# Altium PCB ver4.0.PcbDoc (part 1 of 2)
Units mil, origin at the board's own origin, x right, y up, seen from the top; angles counter-clockwise.
Board outline 2300 x 3750 mil, 2 copper layers (Top Layer, Bottom Layer); 43 components, 35 nets, 213 pads, 55 vias.
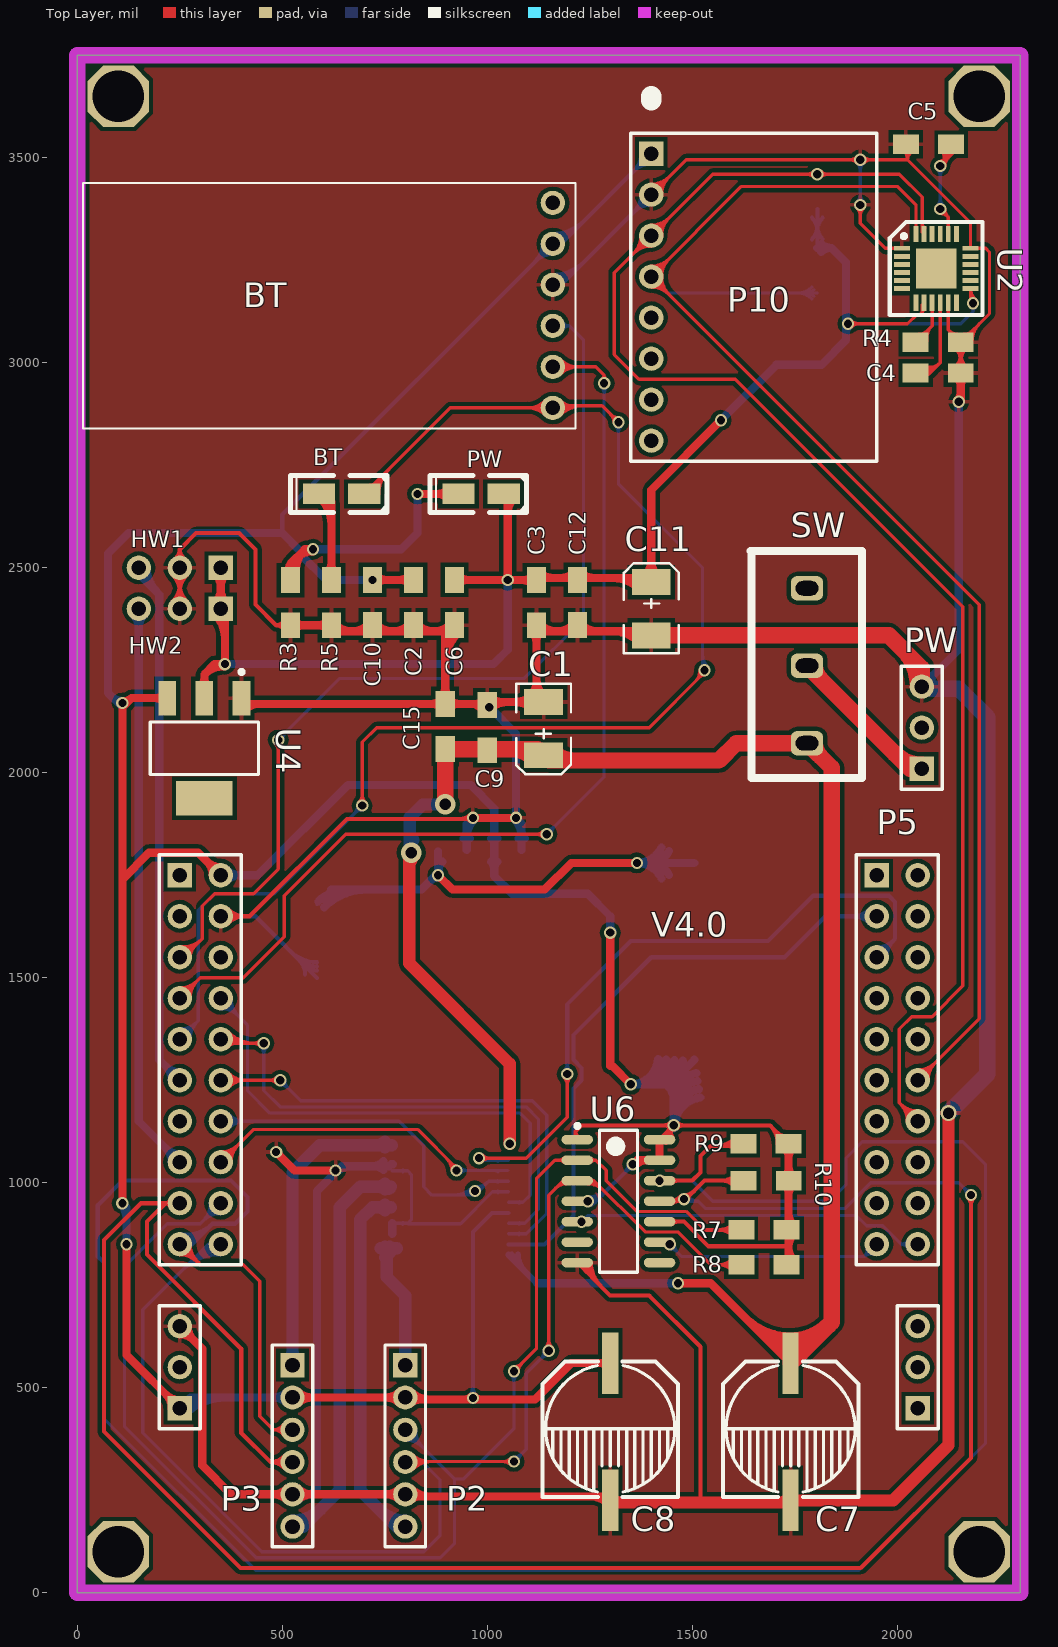
[diagram p0: Top Layer view]
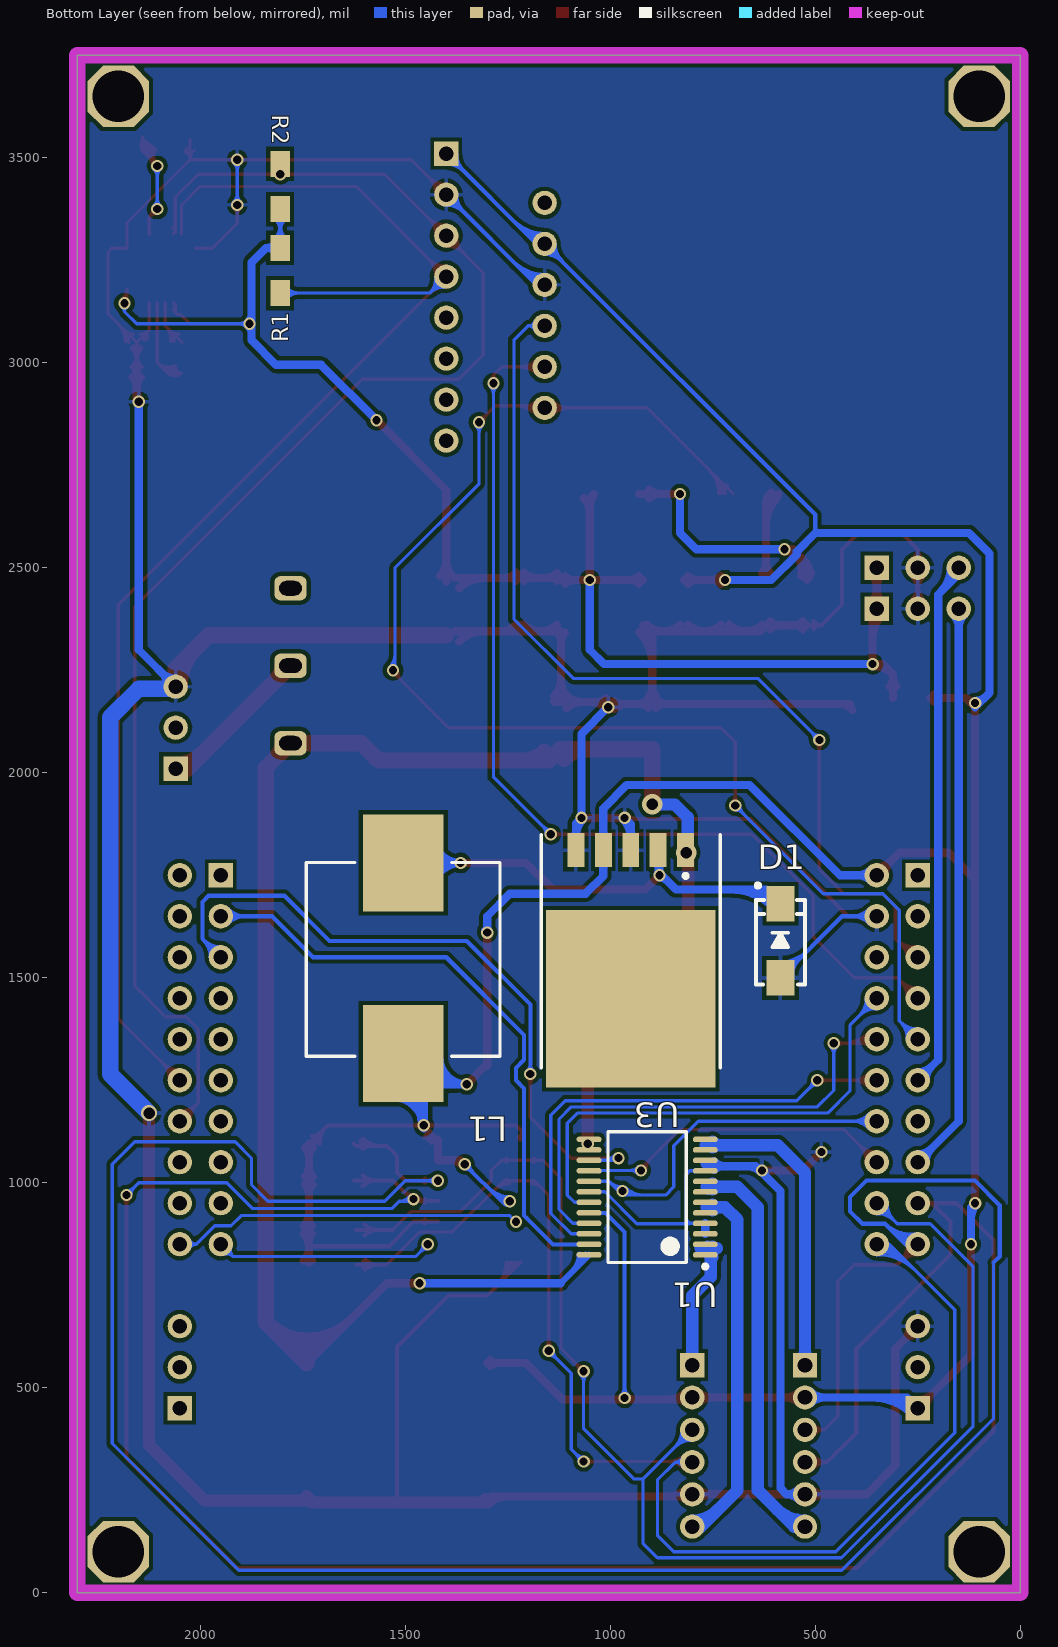
[diagram p1: Bottom Layer view, seen from below]

## Layer stack, top to bottom
Top Layer: signal copper 1.4
Dielectric: dielectric 12.6, FR-4, Dk 4.8
Bottom Layer: signal copper 1.4

## Board outline
0,0 2300,0 2300,3750 0,3750

## Design rules (kind name [scope] priority, off if disabled: settings)
Clearance [All] p1: gap=2
HoleSize [All] p1: absolutevalues=TRUE maxlimit=150 minlimit=1 maxpercent=80.000 minpercent=20.000
MinimumSolderMaskSliver [All] p1: minsoldermaskwidth=0
PlaneClearance [All] p1: clearance=10
PolygonConnect [All] p1: connectstyle=Relief reliefconductorwidth=10 reliefentries=4 polygonreliefangle="90 Angle" airgapwidth=10
RoutingVias [All] p1: holewidth=28 width=25 viastyle="Through Hole" minholewidth=10 minwidth=20 maxholewidth=28 maxwidth=50
SilkToSilkClearance [All] p1: silktosilkclearance=0
SilkToSolderMaskClearance [IsPad] p1: minsilkscreentomaskgap=0 clearancetoexposedcopper=TRUE
SolderMaskExpansion [All] p1: expansion=4
Width [All] p1: maxlimit=60 minlimit=5 preferedwidth=10
23 further rules are at their usual default settings.

## Classes and differential pairs
component class Sheet1: BT C1 C2 C3 C4 C5 C6 C7 C8 C9 C10 C11 C12 C15 D1 HW1 HW2 L1 P2 P3 P5 P10 PW R1 R2 R3 R4 R5 R7 R8 R9 R10 S2 U1 U2 U3 U4 U6 ""

## Components (designator, comment, footprint, x,y, rotation, side; value= is the part's Value field where it differs from the comment)
BT "Header 6" "HC05 MODULE" 1160,2840 r90 top (schematic designator P7)
BT "LED2" LED-0805-手工焊接 700,2680 r180 top (schematic designator D3)
C1 "Cap Pol3" "CAP POL-SMD-B" 1137.38,2107.62 r90 top
C2 "Cap" CAP-0805-手工焊接 820,2360 r90 top
C3 "Cap" CAP-0805-手工焊接 1120,2470 r270 top
C4 "Cap" CAP-0805-手工焊接 2155,2975 r180 top
C5 "Cap" CAP-0805-手工焊接 2021,3533 r0 top
C6 "Cap" CAP-0805-手工焊接 920,2360 r90 top
C7 "Cap Pol1" C_SMD(8x10.3) 1740,400 r270 top
C8 "Cap Pol1" C_SMD(8x10.3) 1300,400 r270 top
C9 "Cap" CAP-0805-手工焊接 1000,2165 r270 top
C10 "Cap" CAP-0805-手工焊接 720,2360 r90 top
C11 "Cap Pol2" "CAP POL-SMD-B" 1400,2400 r270 top
C12 "Cap" CAP-0805-手工焊接 1220,2360 r90 top
C15 "Cap" CAP-0805-手工焊接 897.38,2057.62 r90 top
D1 "E2SD" SMA 585,1590 r90 bottom
HW1 "Header 3" "HDR1*3 no_edge" 350,2500 r180 top (schematic designator P8)
HW2 "Header 3" "HDR1*3 no_edge" 350,2400 r180 top (schematic designator P9)
L1 "Inductor" CDRH127 1505,1545 r270 bottom
P2 "Header 6" "PH2.0 6P" 800,555 r270 top
P3 "Header 6" "PH2.0 6P" 525,555 r270 top
P4 "Header 10X2" "HDR2X10 - duplicate" 250,1750 r270 top
P5 "Header 10X2" "HDR2X10 - duplicate" 1950,1750 r270 top
P6 "Header 3" HDR1X3 2050,450 r90 top
P6 "Header 3" HDR1X3 250,450 r90 top
P10 "Header 8" "mpu6050 module" 1400,3510 r270 top
PW "Header 3" HDR1X3 2060,2010 r90 top (schematic designator P1)
PW "LED2" LED-0805-手工焊接 1040,2680 r180 top (schematic designator D2)
R1 "Res1" RES-0805_手工焊接 1805,3170 r90 bottom
R2 "Res1" RES-0805_手工焊接 1805,3485 r270 bottom
R3 "Res3" RES-0805_手工焊接 520,2470 r270 top
R4 "Res1" RES-0805_手工焊接 2155,3050 r180 top
R5 "Res3" RES-0805_手工焊接 620,2470 r270 top
R7 "Res1" RES-0805_手工焊接 1730,885 r180 top
R8 "Res1" RES-0805_手工焊接 1730,800 r180 top
R9 "Res1" RES-0805_手工焊接 1735,1095 r180 top
R10 "Res1" RES-0805_手工焊接 1625,1005 r0 top
SW "SW-SPDT" ss12d10 1780,2450 r270 top (schematic designator S2)
U1 "tb6612fng" "tb6612fng - duplicate" 910,965 r0 bottom
U2 "mpu6050" QFN-24 2095,3230 r0 top
U3 "LM2596T-5V" "TO-263-5 - TYPE1" 950,1645 r0 bottom
U4 "AMS1117" SOT-223 310,2060 r180 top
U6 "74hc74_s014" 74HC74D_SOP14 1320,955 r0 top

## Footprints (in the part's own frame and the unit in brackets; to place one, negate y for a bottom-side part, rotate by r counter-clockwise, add the part's x,y. Pads: shape width x height; smd on the part's side, far side on the other; paste and mask are expansions set on the pad)
74HC74D_SOP14 [mm] "SOP, 14-Leads, Body 8.65x3.90mm, Pitch 1.27mm, IPC Medium Density"
  oval 1.95x0.6 smd: 1(-2.55,3.81) 2(-2.55,2.54) 3(-2.55,1.27) 4(-2.55,0) 5(-2.55,-1.27) 6(-2.55,-2.54) 7(-2.55,-3.81) 8(2.55,-3.81) 9(2.55,-2.54) 10(2.55,-1.27) 11(2.55,0) 12(2.55,1.27) 13(2.55,2.54) 14(2.55,3.81)
  silkscreen extent -2.67,-4.4 1.17,4.78, body extent -2,-4.4 2,4.4, height 1.75
C_SMD(8x10.3) [mm]
  rect 3.81x1 smd: 1(-4.064,0) 2(4.445,0)
  silkscreen extent -4.17,-4.2 4.23,4.2
"CAP POL-SMD-B" [mil]
  rect 63x95 smd: 1(-65,0) 2(65,0)
  silkscreen extent -111,-67 109,67
CAP-0805-手工焊接 [mm]
  rect 1.6x1.2 smd: 1(0,0) 2(2.8,0)
  body extent 0.37,-0.65 2.37,0.6, height 0.78
CDRH127 [mm]
  rect 6x5 smd: 1(-5.969,0) 2(5.842,0)
  silkscreen extent -6,-6 6,6, body extent -6,-6 6,6, height 7.5
"HC05 MODULE" [mm]
  round 1.5 hole 0.9: 1(1.27,0) 2(3.81,0) 3(6.35,0) 4(8.89,0) 5(11.43,0) 6(13.97,0)
  silkscreen extent 0,-1.4 15.2,29.1
"HDR1*3 no_edge" [mm]
  rect 1.5x1.5 hole 0.9: 1(0,0)
  round 1.5 hole 0.9: 2(2.54,0) 3(5.08,0)
HDR1X3 [mm] "Connector; Header; 3 Position"
  rect 1.5x1.5 hole 0.9: 1(0,0)
  round 1.5 hole 0.9: 2(2.54,0) 3(5.08,0)
  silkscreen extent -1.27,-1.27 6.35,1.27, body extent -1.27,-1.27 6.35,1.27, height 7.58
"HDR2X10 - duplicate" [mm] "Connector; Header; 10x2 Position"
  rect 1.5x1.5 hole 0.9: 1(0,0)
  round 1.5 hole 0.9: 2(0,2.54) 3(2.54,0) 4(2.54,2.54) 5(5.08,0) 6(5.08,2.54) 7(7.62,0) 8(7.62,2.54) 9(10.16,0) 10(10.16,2.54) 11(12.7,0) 12(12.7,2.54) 13(15.24,0) 14(15.24,2.54) 15(17.78,0) 16(17.78,2.54) 17(20.32,0) 18(20.32,2.54) 19(22.86,0) 20(22.86,2.54)
  silkscreen extent -1.27,-1.27 24.13,3.81, body extent -1.27,-1.27 24.13,3.81, height 7.58
LED-0805-手工焊接 [mm]
  rect 2x1.27 smd: 1(0,0) 2(2.8,0)
  silkscreen extent -1.43,-1.14 4.57,1.14, body extent 0.31,-0.65 2.33,0.6, height 1.1
"mpu6050 module" [mm]
  rect 1.5x1.5 hole 0.9: 1(0,0)
  round 1.5 hole 0.9: 2(2.54,0) 3(5.08,0) 4(7.62,0) 5(10.16,0) 6(12.7,0) 7(15.24,0) 8(17.78,0)
  silkscreen extent -3.56,-1.27 19.05,13.97
"PH2.0 6P" [mm]
  rect 1.5x1.5 hole 0.9: 1(0,0)
  round 1.5 hole 0.9: 2(2,0) 3(4,0) 4(6,0) 5(8,0) 6(10,0)
  silkscreen extent -1.25,-1.25 11.25,1.25
QFN-24 [mm]
  rect 1x0.3 smd: 1(-2.125,1.25) 2(-2.125,0.75) 3(-2.125,0.25) 4(-2.125,-0.25) 5(-2.125,-0.75) 6(-2.125,-1.25) 13(2.125,-1.25) 14(2.125,-0.75) 15(2.125,-0.25) 16(2.125,0.25) 17(2.125,0.75) 18(2.125,1.25)
  rect 0.3x1 smd: 7(-1.25,-2.125) 8(-0.75,-2.125) 9(-0.25,-2.125) 10(0.25,-2.125) 11(0.75,-2.125) 12(1.25,-2.125) 19(1.25,2.125) 20(0.75,2.125) 21(0.25,2.125) 22(-0.25,2.125) 23(-0.75,2.125) 24(-1.25,2.125)
  rect 2.5x2.5 smd: 25(0,0)
  silkscreen extent -2.87,-2.87 2.88,2.88, body extent -2,-2 2,2, height 0.9
RES-0805_手工焊接 [mm]
  rect 1.6x1.2 smd: 1(0,0) 2(2.8,0)
  body extent 0.3,-0.58 2.3,0.68, height 0.55
SMA [mm] "4.5x2.6*2.2mm（长宽高，不包括引脚）"
  rect 2.2x1.75 smd: 1(-2.3,0) 2(2.3,0)
  silkscreen extent -2.7,-1.52 3.56,1.52, body extent -2.53,-1.3 2.57,1.3, height 2.15
SOT-223 [mm] "SOT-223/SC-73; 4 Leads; Body 6.7 x 7.3 mm, inc. leads (LxW max)"
  rect 1.1x2.15 smd: 1(-2.3,-3.1) 2(0,-3.1) 3(2.3,-3.1)
  rect 3.5x2.15 smd: 4(0,3.1)
  silkscreen extent -3.35,-4.85 3.35,1.62, body extent -3.25,-3.58 3.25,3.38, height 1.65
ss12d10 [mm]
  rrect50% 1.5x2 hole 0.9 slot 1.4 at 90 deg: 1(0,0) 2(4.8,0) 3(9.6,0)
  silkscreen extent -2.3,-3.5 11.75,3.4
"tb6612fng - duplicate" [mm] "TSOP, 24-Leads, Body 7.90x5.60mm, Pitch 0.65mm, IPC Medium Density"
  oval 1.55x0.35 smd: 1(-3.6,3.575) 2(-3.6,2.925) 3(-3.6,2.275) 4(-3.6,1.625) 5(-3.6,0.975) 6(-3.6,0.325) 7(-3.6,-0.325) 8(-3.6,-0.975) 9(-3.6,-1.625) 10(-3.6,-2.275) 11(-3.6,-2.925) 12(-3.6,-3.575) 13(3.6,-3.575) 14(3.6,-2.925) 15(3.6,-2.275) 16(3.6,-1.625) 17(3.6,-0.975) 18(3.6,-0.325) 19(3.6,0.325) 20(3.6,0.975) 21(3.6,1.625) 22(3.6,2.275) 23(3.6,2.925) 24(3.6,3.575)
  silkscreen extent -3.72,-4.05 2.42,4.42
"TO-263-5 - TYPE1" [mm] "贴片LM2596"
  rect 1.05x2.1 smd: 1(-3.4,-4.225) 2(-1.7,-4.225) 3(0,-4.225) 4(1.7,-4.225) 5(3.4,-4.225)
  rect 10.5x11 smd: 6(0,4.987)
  silkscreen extent -5.55,-5.17 5.55,9.28, body extent -5.33,-4.7 5.33,10.29, height 3

## Part data
BT P2 P3: "Header, 6-Pin"
BT PW: "Typical RED, GREEN, YELLOW, AMBER GaAs LED"
C1: "Polarized Capacitor (Surface Mount)"
C2 C3 C4 C5 C6 C9 C10 C12 C15: "Capacitor"
C7 C8: "Polarized Capacitor (Radial)"
C11: "Polarized Capacitor (Axial)"
D1: library part Diode, "Default Diode"
HW1 HW2 P6 P6 PW: "Header, 3-Pin"
P4 P5: "Header, 10-Pin, Dual row"
P10: "Header, 8-Pin"
R1 R2 R3 R4 R5 R7 R8 R9 R10: "Resistor"
SW: "SPDT Subminiature Toggle Switch, Right Angle Mounting, Vertical Actuation"

## Free pads (board coordinates)
  oct 150x150 hole 125: 17(100,100) 17(100,3650) 17(2200,100) 17(2200,3650)

## Via types
v1: diameter 30, hole 20, Top Layer to Bottom Layer, 52 vias
v2: diameter 50, hole 28, Top Layer to Bottom Layer, 2 vias
v3: diameter 40, hole 28, Top Layer to Bottom Layer, 1 vias

## Nets (pads, with @x,y where several pads share a name; then routed paths per layer and width w, separated by ;. In a path a pad name is that pad's centre, name@x,y a point inside that pad or via, vN(x,y) a via of type N, cw(c..) or ccw(c..) an arc to the next point about the centre after c; other vN are vias at no path point)
->RX: BT.2@1160,2990 P4.7 | length 2907.7
  Top Layer w8: P4.7@250,1450 300,1500 405,1500 505,1600 505,1700 655,1850 v1(1145,1850) ; P4.7@250,1467.53 ccw(c250,1509.84) 279.92,1479.92 ccw(c309.84,1450) P4.7@267.53,1450 ; P4.7@250,1475.53 ccw(c250,1537.16) 293.58,1493.58 ccw(c337.16,1450) P4.7@275.53,1450 ; v1@1137.22,1842.22 ccw(c1118.44,1823.44) 1118.44,1850 ccw(c1118.44,1876.56) v1@1137.22,1857.78 ; BT.2@1160,2990 1265,2990 1285,2970 ; BT.2@1172.39,2977.61 cw(c1202.32,2947.68) 1202.32,2990 cw(c1202.32,3032.32) BT.2@1172.39,3002.39 ; BT.2@1178.05,2971.95 cw(c1221.63,2928.37) 1221.63,2990 cw(c1221.63,3051.63) BT.2@1178.05,3008.05 ; v1@1279.11,2959.29 ccw(c1272.32,2970) 1285,2970 ; v1(1285,2950) 1285,2970 ; v1@1290.89,2959.29 cw(c1297.68,2970) 1285,2970
  Bottom Layer w8: v1(1145,1850) 1285,1990 v1(1285,2950) ; v1@1145,1861 ccw(c1145,1887.56) 1163.78,1868.78 ccw(c1182.56,1850) v1@1156,1850 ; v1@1277.22,2942.22 cw(c1258.44,2923.44) 1285,2923.44 cw(c1311.56,2923.44) v1@1292.78,2942.22
->TX: BT.3 P4.5 | length 2619.1
  Top Layer w8: P4.5@250,1550 260,1550 305,1595 ; P4.5@250.75,1559.5 ccw(c253.72,1597.2) 280.46,1570.46 ; P4.5@251.38,1567.47 ccw(c255.51,1619.95) 292.73,1582.73 ; P4.5@252,1575.45 ccw(c257.3,1642.69) 305,1595 ; P4.5@275.53,1550 cw(c313.01,1550) 286.51,1576.51 ; v1@482.22,2072.22 cw(c463.44,2053.44) 490,2053.44 cw(c516.56,2053.44) v1@497.78,2072.22 ; v1(490,2080) 490,1765 430,1705 335,1705 305,1675 305,1595
  Bottom Layer w8: v1(490,2080) 640,2230 1090,2230 1235,2375 1235,3055 1200,3090 ; v1@490,2091 ccw(c490,2117.56) 508.78,2098.78 ccw(c527.56,2080) v1@501,2080 ; BT.3@1160,3090 1200,3090 ; BT.3@1183.15,3079.25 cw(c1200,3071.43) 1200,3090 ; BT.3@1183.15,3100.75 ccw(c1200,3108.57) 1200,3090
A01: P2.1 U1.1 U1.2 | length 454.7
  Bottom Layer w30: 740.47,840 ccw(c740.47,854.02) U1.2@750.38,844.11 ; U1.1@750.38,818.52 ccw(c739.23,829.67) U1.1@755,829.67 ; U1.1@750.38,829.99 cw(c739.23,818.84) U1.1@755,818.84 ; U1.1@760.85,827.53 cw(c780,819.06) 780,840 755,840 755,770 800,725 P2.1@800,555 ; U1.2@762.53,844.11 ccw(c772.45,854.02) 772.45,840 ; P2.1@789.73,565.27 ccw(c764.93,590.07) 800,590.07 ccw(c835.07,590.07) P2.1@810.27,565.27
A02: P2.6 U1.5 U1.6 | length 1000
  Bottom Layer w30: 731.91,940 cw(c731.91,913.88) U1.5@750.38,932.35 ; 734.76,940 ccw(c734.76,962.09) U1.6@750.38,946.47 ; 738.84,201.16 ccw(c800,262.32) P2.6@800,175.83 ; 765,940 720,940 690,910 690,250 778.7,161.3 P2.6@800,161.3
AIN1: P4.10 U1.21 | length 1541.3
  Top Layer w8: P4.10@350,1350 360,1340 v1(455,1340) ; P4.10@351.08,1351.08 ccw(c377.83,1377.83) 377.83,1340 ; P4.10@356.74,1356.74 ccw(c397.14,1397.14) 397.14,1340 ; P4.10@362.39,1362.39 ccw(c416.46,1416.46) 416.46,1340 ; P4.10@368.05,1331.95 cw(c387.49,1312.51) 387.49,1340 ; P4.10@368.05,1368.05 ccw(c435.77,1435.77) 435.77,1340 ; v1@447.22,1332.22 ccw(c428.44,1313.44) 428.44,1340 ccw(c428.44,1366.56) v1@447.22,1347.78
  Bottom Layer w8: v1@447.22,1332.22 cw(c428.44,1313.44) 455,1313.44 cw(c481.56,1313.44) v1@462.78,1332.22 ; 455,1325 455,1225 495,1185 1095,1185 1125,1155 1125,935 1091.02,901.02 U1.21@1051.73,901.02 ; U1.21@1077.4,898.98 cw(c1082.33,894.05) 1082.33,901.02 cw(c1082.33,908) U1.21@1077.4,903.07
AIN2: P4.12 U1.22 | length 1441.7
  Top Layer w8: P4.12@350,1250 v1(495,1250) ; P4.12@362.39,1237.61 cw(c392.32,1207.68) 392.32,1250 cw(c392.32,1292.32) P4.12@362.39,1262.39 ; P4.12@368.05,1231.95 cw(c411.63,1188.37) 411.63,1250 cw(c411.63,1311.63) P4.12@368.05,1268.05 ; v1@487.22,1242.22 ccw(c468.44,1223.44) 468.44,1250 ccw(c468.44,1276.56) v1@487.22,1257.78
  Bottom Layer w8: v1@495,1239 cw(c495,1212.44) 513.78,1231.22 cw(c532.56,1250) v1@506,1250 ; v1(495,1250) 545,1200 1110,1200 1145,1165 1145,925 1095.43,875.43 U1.22@1051.73,875.43 ; U1.22@1077.4,873.39 cw(c1082.33,868.46) 1082.33,875.43 cw(c1082.33,882.41) U1.22@1077.4,877.48
B01: P3.1 U1.11 U1.12 | length 832.3
  Bottom Layer w30: P3.1@514.73,565.27 ccw(c489.93,590.07) 525,590.07 ccw(c560.07,590.07) P3.1@535.27,565.27 ; P3.1@525,555 525,1025 591.73,1091.73 766.73,1091.73 ; 730.39,1091.73 ccw(c730.39,1120.01) U1.12@750.38,1100.01 ; 736.28,1091.73 cw(c736.28,1071.8) U1.11@750.38,1085.89
B02: P3.6 U1.7 U1.8 | length 1109.8
  Bottom Layer w30: P3.6@525,161.3 551.3,161.3 640,250 640,940 690,990 765,990 760,985 ; P3.6@525,175.83 ccw(c525,274.39) 594.7,204.7 ; 731.91,990 ccw(c731.91,1016.12) U1.8@750.38,997.65 ; 734.76,990 cw(c734.76,967.91) U1.7@750.38,983.53
BIN1: P4.14 U1.17 | length 1170.1
  Bottom Layer w8: P4.14@350,1150 785,1150 845,1090 845,990 865,970 v1@975,970 ; P4.14@362.39,1137.61 cw(c392.32,1107.68) 392.32,1150 cw(c392.32,1192.32) P4.14@362.39,1162.39 ; P4.14@368.05,1131.95 cw(c411.63,1088.37) 411.63,1150 cw(c411.63,1211.63) P4.14@368.05,1168.05 ; 919.3,970 ccw(c919.3,1030.7) v1@962.22,987.78 ; 938.62,970 ccw(c938.62,1011.38) v1@967.88,982.12 ; 957.93,970 ccw(c957.93,992.07) v1@973.54,976.46 ; v1@970.18,982.99 ccw(c971.81,1009.83) 990.82,990.82 ; v1@970.67,990.98 ccw(c973.25,1033.52) 1003.38,1003.38 ; v1@980,980 1003.39,1003.39 ; U1.17@1026.07,1001.34 ccw(c1021.13,996.41) 1021.13,1003.39 ccw(c1021.13,1010.36) U1.17@1026.07,1005.43 ; U1.17@1051.73,1003.39 1003.39,1003.39
  other v1: 970,980
BIN2: P4.16 U1.16 | length 1048.3
  Top Layer w8: P4.16@350,1050 430,1130 830,1130 925,1035 v1(925,1030) ; P4.16@350,1067.53 ccw(c350,1109.84) 379.92,1079.92 ccw(c409.84,1050) P4.16@367.53,1050 ; P4.16@350,1075.53 ccw(c350,1137.16) 393.58,1093.58 ccw(c437.16,1050) P4.16@375.53,1050 ; 902.69,1057.31 cw(c875.37,1030) v1@914,1030 ; 914.76,1045.24 ccw(c925,1055.49) v1@925,1041 ; 916.34,1043.66 cw(c902.69,1030) v1@922,1030
  Bottom Layer w8: v1(925,1030) U1.16@1050.71,1030 ; v1@932.78,1022.22 cw(c951.56,1003.44) 951.56,1030 cw(c951.56,1056.56) v1@932.78,1037.78 ; 1018.66,1030 cw(c1018.66,1019.53) U1.16@1026.07,1026.93
ENCODER1A: P2.3 P4.18 R7.2 U6.2 | length 3939.6
  Top Layer w8: v1(1065,540) 1120,595 1120,1010 1165,1055 U6.2@1219.61,1055 1265,1055 ; v1@1065,551 ccw(c1065,577.56) 1083.78,558.78 ccw(c1102.56,540) v1@1076,540 ; U6.2@1187.51,1049.48 ccw(c1174.17,1036.14) 1174.17,1055 ccw(c1174.17,1073.86) U6.2@1187.51,1060.52 ; U6.2@1251.71,1049.48 cw(c1265,1036.24) 1265,1055 ; U6.2@1251.71,1060.52 ccw(c1265,1073.76) 1265,1055 ; 1530,885 1485,930 1365,930 1290,1005 1290,1030 1265,1055
  Top Layer w10: 1530,885 R7.2@1619.76,885 ; R7.2@1598.72,871.83 ccw(c1566.93,840.04) 1566.93,885 ccw(c1566.93,929.96) R7.2@1598.72,898.17
  Bottom Layer w8: P4.18@324.47,950 cw(c262.84,950) 306.42,906.42 cw(c350,862.84) P4.18@350,924.47 ; P4.18@332.47,950 cw(c290.16,950) 320.08,920.08 cw(c350,890.16) P4.18@350,932.47 ; P4.18@350,950 300,900 220,900 115,795 115,406 436,85 885,85 920,120 920,277.52 ; P2.3@800,371.99 cw(c800,310.36) 843.58,353.94 cw(c887.16,397.52) P2.3@825.53,397.52 ; P2.3@800,379.99 cw(c800,337.68) 829.92,367.6 cw(c859.84,397.52) P2.3@817.53,397.52 ; P2.3@800,397.52 920,277.52 ; v1@1057.22,532.22 cw(c1038.44,513.44) 1065,513.44 cw(c1091.56,513.44) v1@1072.78,532.22 ; v1(1065,540) 1065,400 942.52,277.52 920,277.52
ENCODER1B: P2.4 P4.20 R8.2 U6.3 | length 4187.4
  Top Layer w8: P2.4@800,318.78 801.22,320 v1(1065,320) ; P2.4@812.39,306.39 cw(c845.26,273.52) 845.26,320 ; P2.4@812.39,331.17 ccw(c839.37,358.15) 839.37,320 ; P2.4@818.05,300.73 cw(c864.58,254.2) 864.58,320 ; P2.4@818.05,336.83 ccw(c858.68,377.46) 858.68,320 ; v1@1057.22,312.22 ccw(c1038.44,293.44) 1038.44,320 ccw(c1038.44,346.56) v1@1057.22,327.78 ; v1@1142.22,597.78 ccw(c1123.44,616.56) 1150,616.56 ccw(c1176.56,616.56) v1@1157.78,597.78 ; v1(1150,590) 1150,970 1185,1005 U6.3@1219.61,1005 1260,1005 ; 1165.99,985.99 cw(c1193.03,958.94) U6.3@1193.03,997.19 ; 1179.64,999.64 cw(c1193.03,986.26) U6.3@1193.03,1005.19 ; U6.3@1246.18,997.19 cw(c1246.18,944.97) 1283.11,981.89 ; U6.3@1246.18,1005.19 cw(c1246.18,972.28) 1269.45,995.55 ; U6.3@1252.87,1000.97 cw(c1260,996.68) 1260,1005 ; U6.3@1252.87,1009.03 ccw(c1260,1013.32) 1260,1005 ; R8.2@1598.02,786.13 ccw(c1564.52,752.63) 1564.52,800 ccw(c1564.52,847.37) R8.2@1598.02,813.87 ; R8.2@1603.67,791.78 ccw(c1583.83,771.94) 1583.83,800 ccw(c1583.83,828.06) R8.2@1603.67,808.22 ; R8.2@1619.76,800 1545,800 1465,880 1385,880 1260,1005
  Bottom Layer w8: 255.21,785.21 cw(c350,690.42) P4.20@350,824.47 ; 268.87,798.87 cw(c350,717.73) P4.20@350,832.47 ; 282.52,812.52 cw(c350,745.04) P4.20@350,840.47 ; 296.18,826.18 cw(c350,772.36) P4.20@350,848.47 ; 309.84,839.84 cw(c350,799.67) P4.20@350,856.47 ; P4.20@324.8,845.92 ccw(c320,845.14) 320,850 ; P4.20@324.8,854.08 cw(c320,854.86) 320,850 ; P4.20@350,850 320,850 ; P2.4@800,318.78 841.22,318.78 ; P2.4@822.85,307.41 cw(c841.22,298.27) 841.22,318.78 ; P2.4@822.85,330.15 ccw(c841.22,339.29) 841.22,318.78 ; v1(1065,320) 1095,350 1095,535 v1(1150,590) ; v1@1065,331 ccw(c1065,357.56) 1083.78,338.78 ccw(c1102.56,320) v1@1076,320 ; v1@1139,590 cw(c1112.44,590) 1131.22,571.22 cw(c1150,552.44) v1@1150,579 ; 320,850 160,690 160,390 450,100 845,100 885,140 885,275 841.22,318.78
ENCODER2A: P3.3 P4.19 R9.2 U6.12 | length 6861.2
  Top Layer w8: 295,805 300,800 405,800 445,760 445,430 477.48,397.52 ; P3.3@503.72,383.43 ccw(c477.48,366.06) 477.48,397.52 ; P3.3@503.72,411.61 cw(c477.48,428.98) 477.48,397.52 ; P3.3@510.39,387.84 ccw(c492.37,375.92) 492.37,397.52 ccw(c492.37,419.12) P3.3@510.39,407.2 ; P3.3@525,397.52 477.48,397.52
  Top Layer w10: P4.19@250,825.47 cw(c250,766.26) 291.87,808.13 cw(c333.74,850) P4.19@274.53,850 ; P4.19@250,835.47 cw(c250,800.4) 274.8,825.2 cw(c299.6,850) P4.19@264.53,850 ; P4.19@250,850 295,805 ; v1(1420.39,1005) 1500,1005 1520,1025 1520,1065 1545,1090 1619.76,1090 R9.2@1624.76,1095 ; U6.12@1427.46,997.93 cw(c1444.54,980.86) 1444.54,1005 cw(c1444.54,1029.14) U6.12@1427.46,1012.07 ; U6.12@1451.78,1000.18 cw(c1463.41,988.56) 1463.41,1005 cw(c1463.41,1021.44) U6.12@1451.78,1009.82 ; 1559.86,1090 ccw(c1559.86,1152.03) R9.2@1603.72,1108.17 ; R9.2@1603.72,1081.83 ccw(c1584,1062.11) 1584,1090 ccw(c1584,1127.89) R9.2@1610.79,1101.1
  Bottom Layer w8: 65,805 65,425 435,55 1906,55 2215,364 2215,1045 2160,1100 1915,1100 1875,1060 1875,995 1835,955 1550,955 1500,1005 v1(1420.39,1005) ; v1@1428.17,997.22 cw(c1446.95,978.44) 1446.95,1005 cw(c1446.95,1031.56) v1@1428.17,1012.78
  Bottom Layer w10: 65,805 50,820 50,945 110,1005 375,1005 415,965 415,930 385,900 330,900 ; P4.19@249.25,844.58 ccw(c255.46,889.28) 287.37,857.37 ; P4.19@250,850 280,850 ; P4.19@250.62,854.48 ccw(c258.93,914.23) 301.58,871.58 ; P4.19@252,864.39 ccw(c262.39,939.18) 315.79,885.79 ; P4.19@253.38,874.29 ccw(c265.86,964.14) 330,900 ; P4.19@274.04,845.13 cw(c280,843.92) 280,850 ; P4.19@274.04,854.87 ccw(c280,856.08) 280,850 ; 280,850 330,900
ENCODER2B: P3.4 P4.17 R10.1 U6.11 | length 5968.2
  Top Layer w10: P4.17@226.94,941.63 ccw(c215,937.29) 215,950 ; P4.17@226.94,958.37 cw(c215,962.71) 215,950 ; P4.17@250,950 215,950 ; P3.4@506.48,302.7 ccw(c471.22,272.09) 471.22,318.78 ; P3.4@506.48,334.86 cw(c471.22,365.47) 471.22,318.78 ; P3.4@514.03,309.26 ccw(c493.15,291.13) 493.15,318.78 ccw(c493.15,346.43) P3.4@514.03,328.3 ; P3.4@525,318.78 471.22,318.78 ; U6.11@1420.39,955 1480,955 1530,1005 R10.1@1625,1005 ; U6.11@1443.79,955 ccw(c1443.79,996.21) v1@1472.93,967.07 ; U6.11@1451.78,950.18 cw(c1463.41,938.56) 1463.41,955 cw(c1463.41,971.44) U6.11@1451.78,959.82 ; v1@1480,970 ccw(c1480,1006.21) 1505.61,980.61 ; v1@1490,960 cw(c1502.07,960) 1493.54,968.54 ; R10.1@1603.96,991.83 ccw(c1572.17,960.04) 1572.17,1005 ccw(c1572.17,1049.96) R10.1@1603.96,1018.17 ; v1@2172.93,962.93 cw(c2155.86,945.86) 2180,945.86 cw(c2204.14,945.86) v1@2187.07,962.93 ; v1(2180,970) 2180,329 1911,60 398,60 65,393 65,860 155,950 215,950 ; 215,950 170,905 170,825 400,595 400,390 471.22,318.78
  Bottom Layer w8: v1@1480,955 1480,965 1490,955 1515,955 ; v1@1482.27,961.96 ccw(c1497.5,975.14) 1497.5,955 ; v1@1487.78,952.22 cw(c1494.49,945.51) 1494.49,955 ; v1@1488.32,967.2 ccw(c1515,990.28) 1515,955 ; v1@2169,970 ccw(c2142.44,970) 2161.22,988.78 ccw(c2180,1007.56) v1@2180,981 ; v1(2180,970) 2150,1000 1935,1000 1872,937 1533,937 1515,955
  other v1: 1480,960